# Altium PCB EvalBoard.PcbDoc
Units mil, origin at the board's own origin, x right, y up, seen from the top; angles counter-clockwise.
Board outline 2075 x 1850 mil, 2 copper layers (Top Layer, Bottom Layer); 15 components, 122 nets, 73 pads, 0 vias.
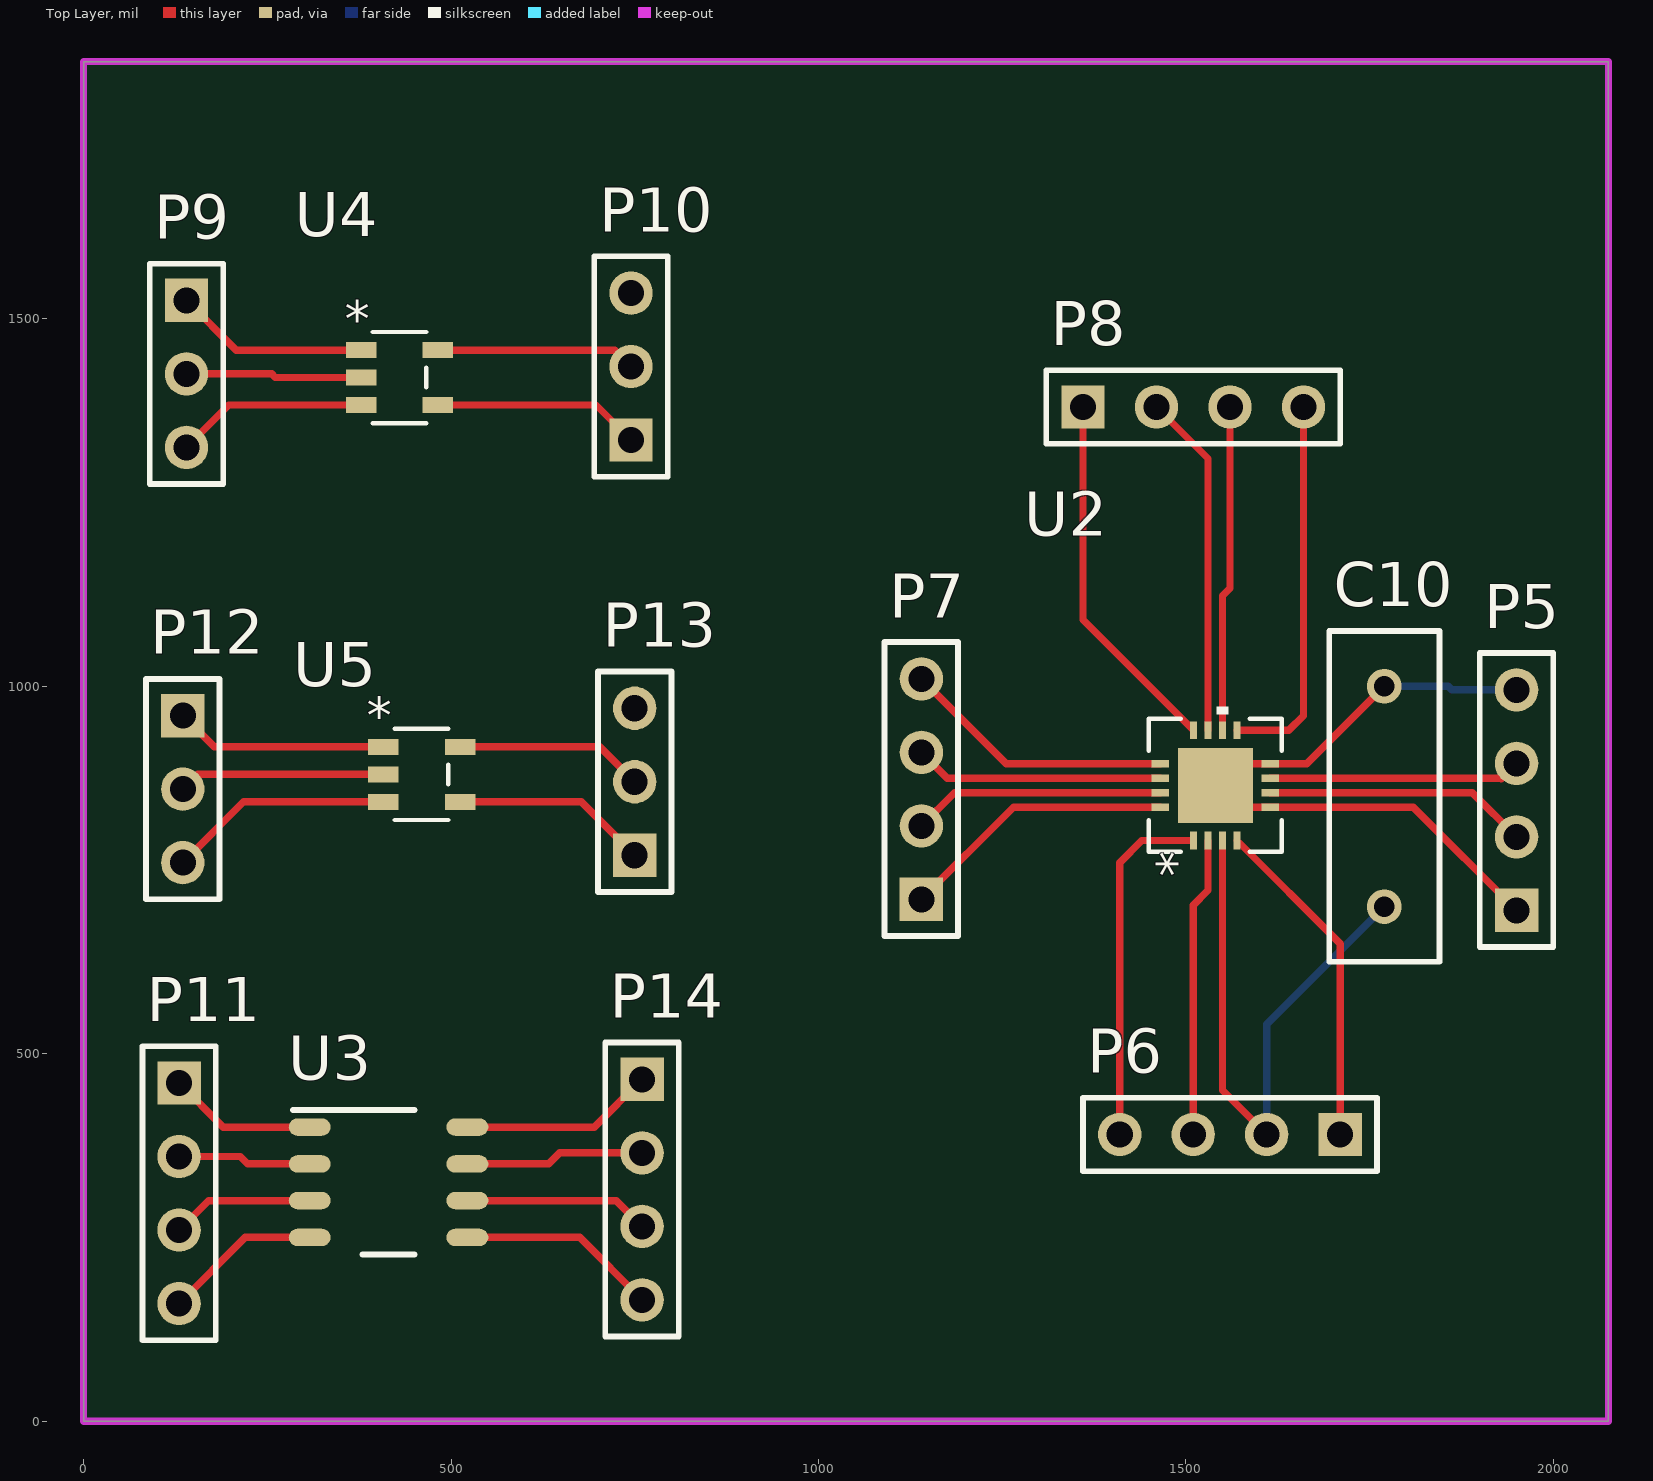
[diagram p0: Top Layer view]
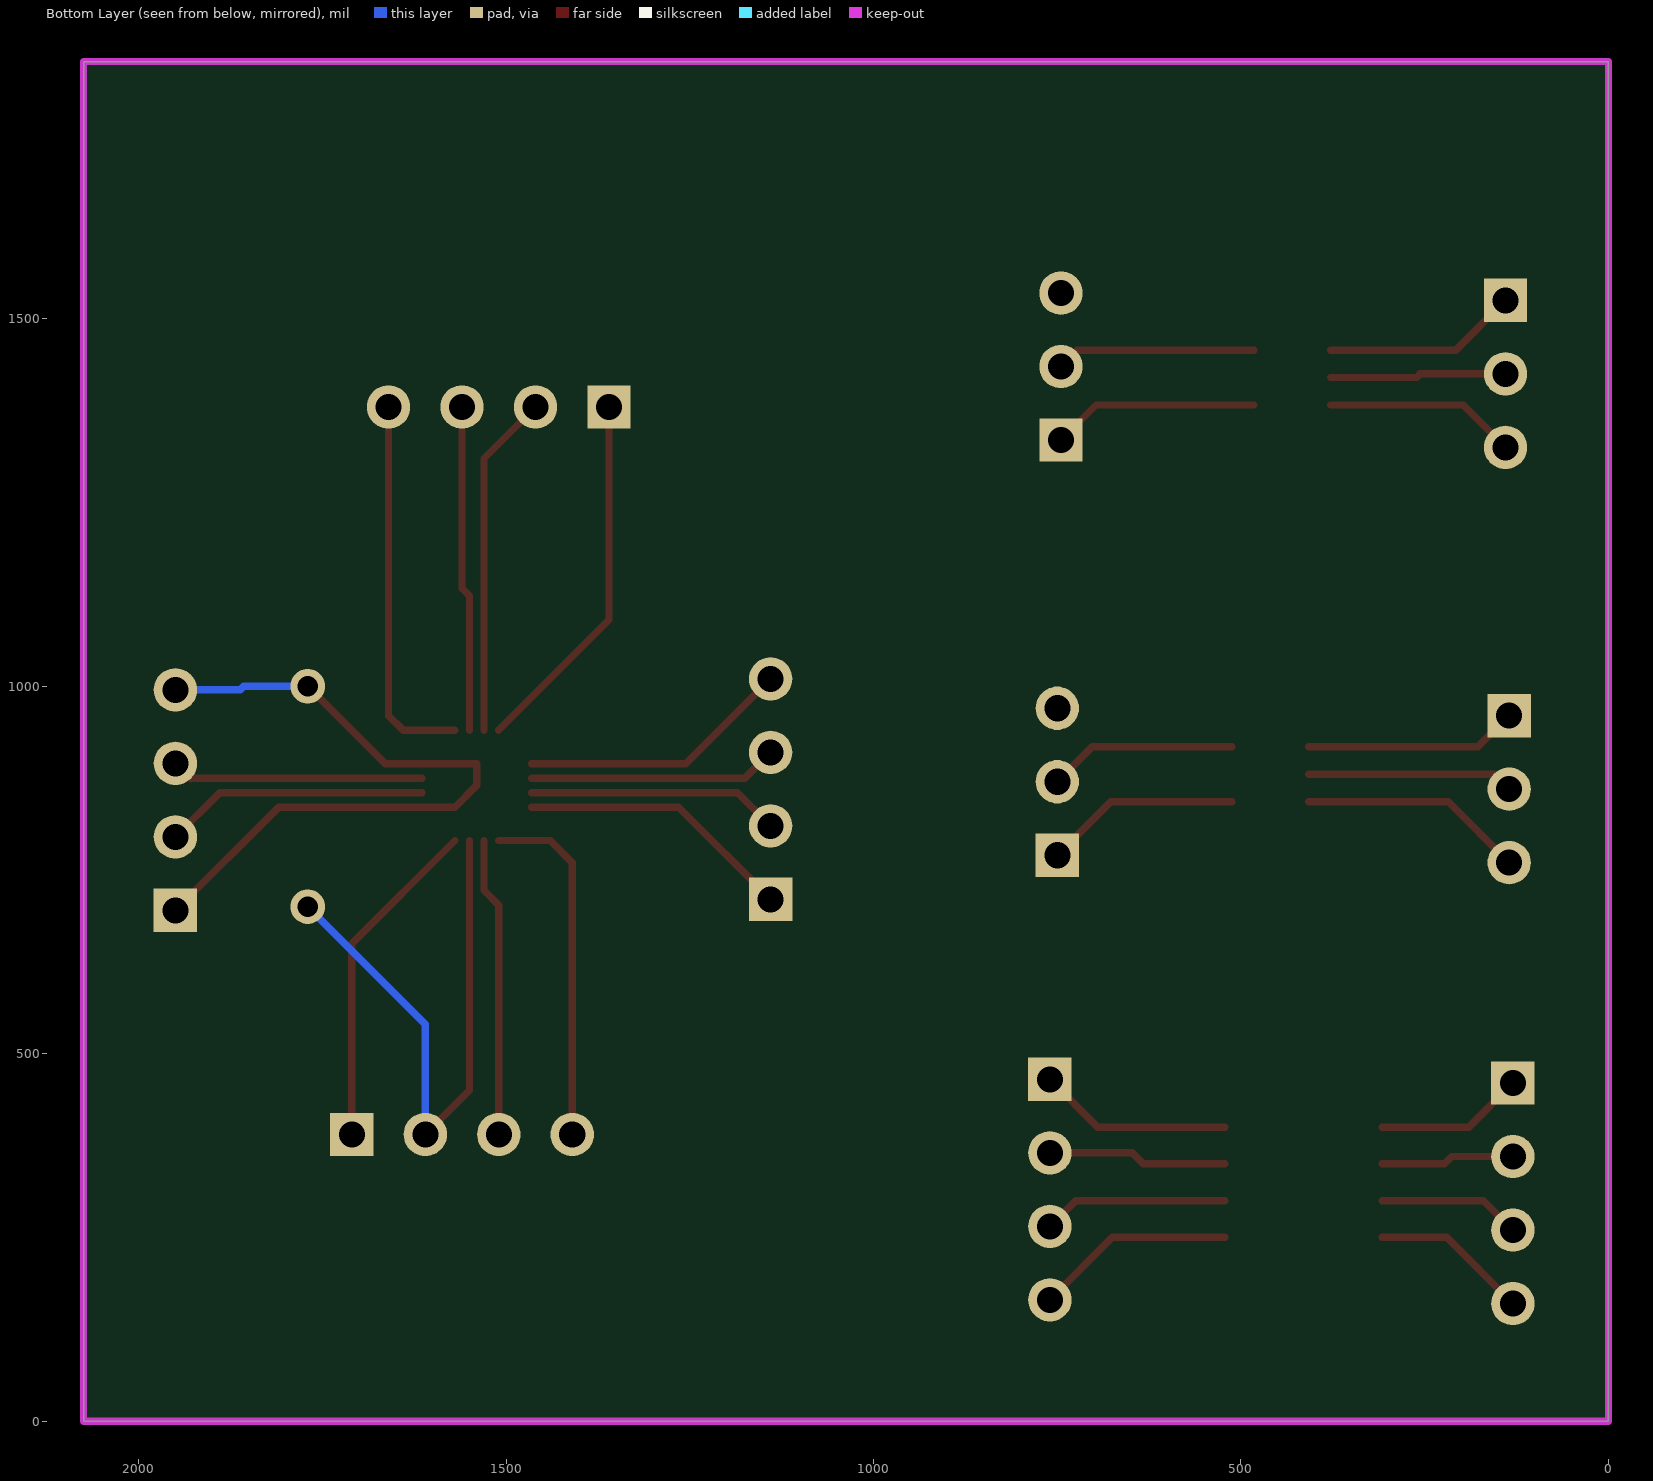
[diagram p1: Bottom Layer view, seen from below]

## Layer stack, top to bottom
Top Solder: solder mask 0.4, Solder Resist, Dk 3.5
Top Layer: signal copper 1.4
Dielectric 1: dielectric 12.6, FR-4, Dk 4.8
Bottom Layer: signal copper 1.4
Bottom Solder: solder mask 0.4, Solder Resist, Dk 3.5

## Board outline
0,0 2075,0 2075,1850 0,1850

## Design rules (kind name [scope] priority, off if disabled: settings)
Clearance [All] p1 off: gap=10 ignorepadtopadclearanceinfootprint=TRUE except(0: Arc-Hole Track-Hole SMDPad-Hole THPad-Hole Via-Hole Fill-Hole Poly-Hole Region-Hole Text-Hole)
PolygonConnect [All] p1: connectstyle=Relief reliefconductorwidth=10 reliefentries=4 polygonreliefangle="90 Angle" airgapwidth=10
RoutingVias [All] p1: holewidth=28 width=50 viastyle="Through Hole" minholewidth=28 minwidth=50 maxholewidth=28 maxwidth=50
SolderMaskExpansion [All] p1: expansion=4 istentingtop=FALSE
Width [All] p1: maxlimit=10 minlimit=10 preferedwidth=10
30 further rules are at their usual default settings.

## Components (designator, comment, footprint, x,y, rotation, side; value= is the part's Value field where it differs from the comment)
C10 "Cap" RAD-0.3 1770,850 r90 top value=100pF
P5 "Header 4" HDR1X4 1950,695 r90 top
P6 "Header 4" HDR1X4 1710,390 r180 top
P7 "Header 4" HDR1X4 1140,710 r90 top
P8 "Header 4" HDR1X4 1360,1380 r0 top
P9 "Header 3" HDR1X3 140,1525 r270 top
P10 "Header 3" HDR1X3 745,1335 r90 top
P11 "Header 4" HDR1X4 130,460 r270 top
P12 "Header 3" HDR1X3 135,960 r270 top
P13 "Header 3" HDR1X3 750,770 r90 top
P14 "Header 4" HDR1X4 760,465 r270 top
U2 "LMH6515SQ/NOPB" SQA16A 1540,865 r90 top
U3 "OPA862IDR" D0008A_N 415,325 r0 top value=Value
U4 "TMUX1102DBVR" SOT-23-5_1P6X2P9_THT 430,1420 r0 top
U5 "TMUX1102DBVR" SOT-23-5_1P6X2P9_THT 460,880 r0 top

## Footprints (in the part's own frame and the unit in brackets; to place one, negate y for a bottom-side part, rotate by r counter-clockwise, add the part's x,y. Pads: shape width x height; smd on the part's side, far side on the other; paste and mask are expansions set on the pad)
D0008A_N [mm]
  oval 1.45x0.6 smd paste+0 mask+0.051: 1(-2.725,1.905) 2(-2.725,0.635) 3(-2.725,-0.635) 4(-2.725,-1.905) 5(2.725,-1.905) 6(2.725,-0.635) 7(2.725,0.635) 8(2.725,1.905)
  silkscreen extent -3.3,-2.5 0.9,2.5, body extent 0,0 0.25,0.25, height 0.25
HDR1X3 [mm] "Connector; Header; 3 Position"
  rect 1.5x1.5 hole 0.9: 1(0,0)
  round 1.5 hole 0.9: 2(2.54,0) 3(5.08,0)
  silkscreen extent -1.27,-1.27 6.35,1.27
HDR1X4 [mm] "Connector; Header; 4 Position"
  rect 1.5x1.5 hole 0.9: 1(0,0)
  round 1.5 hole 0.9: 2(2.54,0) 3(5.08,0) 4(7.62,0)
  silkscreen extent -1.27,-1.27 8.89,1.27
RAD-0.3 [mm] "Radial Cap, Thru-Hole; 2 Leads; 0.3 in Pin Spacing"
  round 1.2 hole 0.7: 1(-3.81,0) 2(3.81,0)
  silkscreen extent -5.71,-1.91 5.71,1.91
SOT-23-5_1P6X2P9_THT [mil]
  rect 41.5x22 smd paste+0 mask+0: 1(-52.25,37.4) 2(-52.25,0) 3(-52.25,-37.4) 4(52.25,-37.4) 5(52.25,37.4)
  silkscreen extent -36,-62 36,62, body extent 0,0 10,10, height 10
SQA16A [mil]
  rect 24x10 smd paste-5: 1(-75,29.53) 2(-75,9.84) 3(-75,-9.84) 4(-75,-29.53) 9(75,-29.53) 10(75,-9.84) 11(75,9.84) 12(75,29.53)
  rect 10x24 smd paste-5: 5(-29.53,-75) 6(-9.84,-75) 7(9.84,-75) 8(29.53,-75) 13(29.53,75) 14(9.84,75) 15(-9.84,75) 16(-29.53,75)
  rect 102x102 smd paste-51: 17(0,0)
  silkscreen extent -90,-90 107,90, body extent 0,0 10,10, height 10

## Part data
C10: "Capacitor", LatestRevisionDate=17-Jul-2002, LatestRevisionNote="Re-released for DXP Platform.", PackageDescription="Radial Cap, Thru-Hole; 2 Leads; 0.3 in Pin Spacing", PackageReference=RAD-0.3, Published=8-Jun-2000, Publisher="Altium Limited"
P5 P6 P7 P8 P11 P14: "Header, 4-Pin", LatestRevisionDate=17-Jul-2002, LatestRevisionNote="Re-released for DXP Platform.", Publisher="Altium Limited"
P9 P10 P12 P13: "Header, 3-Pin", LatestRevisionDate=17-Jul-2002, LatestRevisionNote="Re-released for DXP Platform.", Publisher="Altium Limited"
U2 U4 U5: "No Description Available", Copyright="Copyright (C) 2018 Accelerated Designs. All rights reserved", RefDes=RefDes, Type=DEV
  U4 U5: Datasheet=https://www.ti.com/lit/ds/symlink/tmux1101.pdf?HQS=TI-null-null-digikeymode-df-pf-null-wwe&ts=1603128596910, Manufacturer_Part_Number=TMUX1102DBVR, SourceLibrary=Add_to_database_2020-10-19, Vendor="Texas Instruments"
U3: "No Description Available", Manufacturer="Texas Instruments", Copyright="Copyright (C) 2018 Accelerated Designs. All rights reserved", PartNumber=OPA862IDR, RefDes=RefDes, Type=DEV

## Nets (pads, with @x,y where several pads share a name; then routed paths per layer and width w, separated by ;. In a path a pad name is that pad's centre, name@x,y a point inside that pad or via, vN(x,y) a via of type N, cw(c..) or ccw(c..) an arc to the next point about the centre after c; other vN are vias at no path point)
+5: C10.1 P6.2 U2.3 | length 801.2
  Top Layer w10: U2.3 1549.84,450.16 P6.2
  Bottom Layer w10: P6.2 1610,540 C10.1
AVCC1: 
AVSS1: C10.2 P5.1 P5.4 P9.3 P12.3 U2.5 U2.8 U2.17 U4.3 U5.3 | length 1534.5
  Top Layer w10: P12.3 217.6,842.6 385,842.6 U5.3 ; P9.3 197.6,1382.6 U4.3 U4.3@378,1382.6 ; C10.2 1664.53,894.53 U2.8 1540,894.53 U2.17 1569.53,835.47 U2.5 1809.53,835.47 P5.1
  Bottom Layer w10: C10.2 1857,1000 1862,995 P5.4
D1: P9.1 U4.1 | length 265.8
  Top Layer w10: P9.1 207.6,1457.4 U4.1
D2: P12.1 U5.1 | length 290.4
  Top Layer w10: P12.1 177.6,917.4 U5.1
DCOR: 
GAIN0: P6.4 U2.1 | length 482.9
  Top Layer w10: P6.4 1410,760 1440,790 U2.1
GAIN1: P8.1 U2.12 | length 502.3
  Top Layer w10: P8.1 1360,1090.47 U2.12
GAIN2: P8.2 U2.11 | length 469.1
  Top Layer w10: P8.2 1530.16,1309.84 U2.11
GAIN3: P8.3 U2.10 | length 444.2
  Top Layer w10: U2.10 1549.84,1123 1560,1133.16 P8.3
GAIN4: P8.4 U2.9 | length 518.8
  Top Layer w10: U2.9 1640,940 1660,960 P8.4
IN+: P5.2 U2.6 | length 359.9
  Top Layer w10: U2.6 1889.84,855.16 P5.2
IN-: P5.3 U2.7 | length 344
  Top Layer w10: U2.7 1928.16,874.84 1929,874 P5.3
LATCH: P6.3 U2.2 | length 408.3
  Top Layer w10: P6.3 1510,702 1530.16,722.16 U2.2
LOAD+: P7.4 U2.13 | length 372.8
  Top Layer w10: P7.4 1255.47,894.53 U2.13
LOAD-: P7.1 U2.16 | length 377
  Top Layer w10: P7.1 1265.47,835.47 U2.16
NC: P6.1 U2.4 | length 458.2
  Top Layer w10: U2.4 1710,649.53 P6.1
OUT+: P7.3 U2.14 | length 339.6
  Top Layer w10: P7.3 1175.16,874.84 U2.14
OUT-: P7.2 U2.15 | length 343.7
  Top Layer w10: P7.2 1185.16,855.16 U2.15
P1.0: 
P1.1: 
P1.2: 
P1.3: 
P1.4: 
P1.5: 
P1.6: 
P1.7: 
P2.0: 
P2.1: 
P2.2: 
P2.3: 
P2.4: 
P2.5: 
P2.6: 
P2.7: 
P3.0: 
P3.1: 
P3.2: 
P3.3: 
P3.4: 
P3.5: 
P3.6: 
P3.7: 
P4.0: 
P4.1: 
P4.2: 
P4.3: 
P4.4: 
P4.5: 
P4.6: 
P4.7: 
P5.0: 
P5.1: 
P5.2: 
P5.3: 
P5.4: 
P5.5: 
P5.6: 
P5.7: 
P6.0: 
P6.1: 
P6.2: 
P6.3: 
P6.4: 
P6.5: 
P6.6: 
P6.7: 
P7.0: 
P7.1: 
P7.2: 
P7.3: 
P7.4: 
P7.5: 
P7.6: 
P7.7: 
P8.0: 
P8.1: 
P8.2: 
P8.3: 
P8.4: 
P8.5: 
P8.6: 
P8.7: 
P9.0: 
P9.1: 
P9.2: 
P9.3: 
P9.4: 
P9.5: 
P9.6: 
P9.7: 
P10.0: 
P10.1: 
P10.2: 
P10.3: 
P10.4: 
P10.5: 
PD: P14.2 U3.7 | length 243.9
  Top Layer w10: U3.7 633,350 648,365 P14.2
PJ.0: 
PJ.1: 
PJ.2: 
PJ.3: 
PJ.4: 
PJ.5: 
RST_NMI_N: 
S1: P9.2 U4.2 | length 239.8
  Top Layer w10: P9.2 256,1425 261,1420 U4.2
S2: P12.2 U5.2 | length 281
  Top Layer w10: P12.2 155,880 U5.2
SEL1: P10.1 U4.4 | length 282.5
  Top Layer w10: U4.4 697.4,1382.6 P10.1
SEL2: P13.1 U5.4 | length 267.8
  Top Layer w10: U5.4 677.4,842.6 P13.1
SWCLKTCK: 
SWDIOTMS: 
VCORE: 
VDD1: P10.2 U4.5 | length 272
  Top Layer w10: U4.5 722.6,1457.4 P10.2
VDD2: P13.2 U5.5 | length 257.4
  Top Layer w10: U5.5 702.6,917.4 P13.2
VFB: P11.1 U3.1 | length 202.6
  Top Layer w10: P11.1 190,400 U3.1
VIN: P14.1 U3.8 | length 264.6
  Top Layer w10: U3.8 695,400 P14.1
Vmin: P14.3 U3.6 | length 252.2
  Top Layer w10: U3.6 725,300 P14.3
Vout+: P11.4 U3.4 | length 215
  Top Layer w10: P11.4 220,250 U3.4
Vout-: P14.4 U3.5 | length 272.9
  Top Layer w10: U3.5 675,250 P14.4
Vpos: P11.3 U3.3 | length 194.3
  Top Layer w10: P11.3 170,300 U3.3
VREF: P11.2 U3.2 | length 181.9
  Top Layer w10: P11.2 213,360 223,350 U3.2
VSW: 
pads on no net: P10.3 P13.3

## Polygon pours and split planes (outlines as drawn)
AVSS1 on Bottom Layer "NONET_L02_P002" (solid, shelved, pour order 2): 0,1850 2075,1850 2075,0 0,0
AVSS1 on Top Layer "NONET_L01_P004" (solid, shelved, pour order 4): 0,1850 2075,1850 2075,0 0,0

## Keep-outs
Keep-Out Layer:
  the board outline again, w10

## Text inside footprints (layer, text, board x,y; h text height)
U2: Top Overlay "*" at 1510.63,740.5 h50 r90; Mechanical 13 "*" at 1510.63,740.5 h50 r90
U4: Top Overlay "*" at 355.25,1474.4 h50; Mechanical 13 "*" at 401,1424 h50
U5: Top Overlay "*" at 385.25,934.4 h50; Mechanical 13 "*" at 431,884 h50